# Altium PCB 射频功放HMC580.PcbDoc
Units mil, origin at the board's own origin, x right, y up, seen from the top; angles counter-clockwise.
Board outline 1035 x 1005 mil, 2 copper layers (Top Layer, Bottom Layer); 12 components, 8 nets, 32 pads, 0 vias.
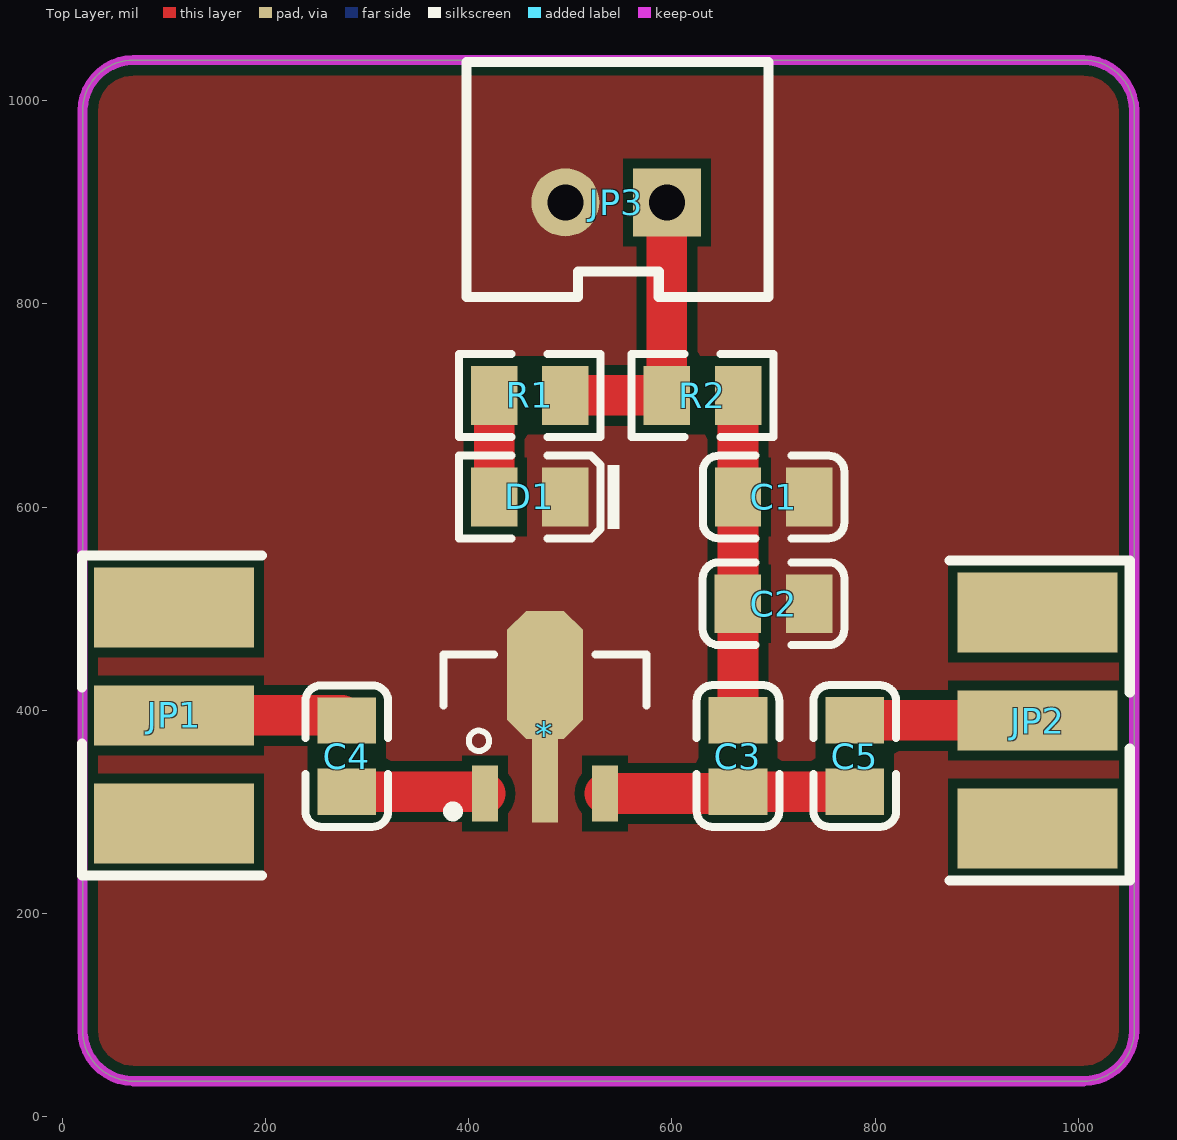
[diagram p0: Top Layer view]
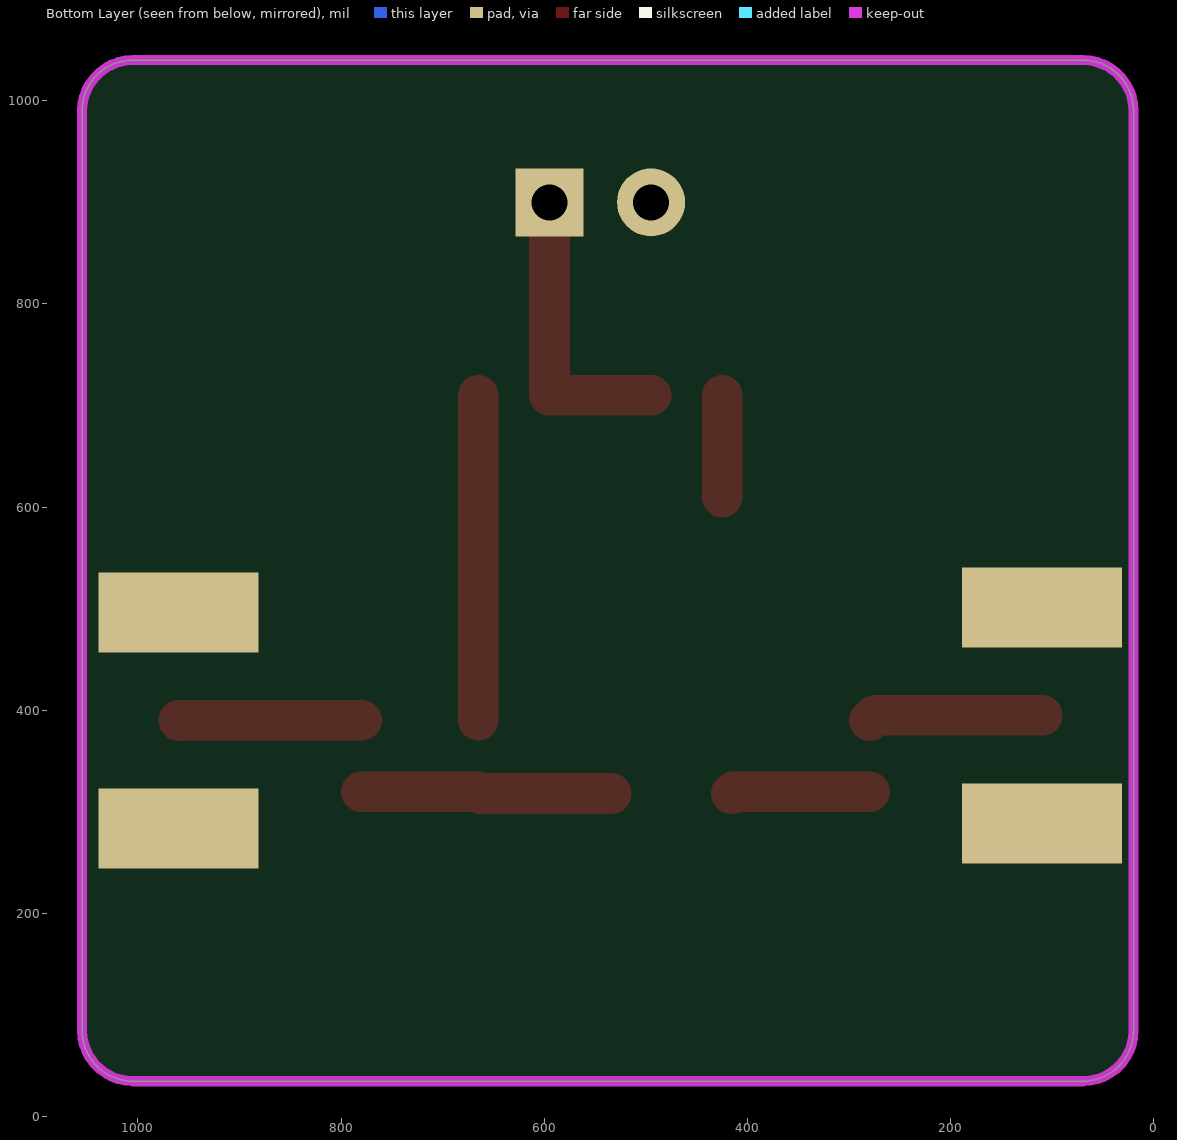
[diagram p1: Bottom Layer view, seen from below]

## Layer stack, top to bottom
Top Solder: solder mask 0.4, Solder Resist, Dk 3.5
Top Layer: signal copper 1.4
Dielectric 1: dielectric 12.6, FR-4, Dk 4.8
Bottom Layer: signal copper 1.4
Bottom Solder: solder mask 0.4, Solder Resist, Dk 3.5

## Board outline
20,85 20,990 cw(c70,990) 70,1040 1005,1040 cw(c1005,990) 1055,990 1055,85 cw(c1005,85) 1005,35 70,35 cw(c70,85)

## Design rules (kind name [scope] priority, off if disabled: settings)
Clearance [All] p1: gap=10 ignorepadtopadclearanceinfootprint=FALSE except(0: Arc-Hole Track-Hole SMDPad-Hole THPad-Hole Via-Hole Fill-Hole Poly-Hole Region-Hole Text-Hole)
PolygonConnect [All] p1: connectstyle=Direct reliefconductorwidth=10 reliefentries=4 polygonreliefangle="90 Angle" airgapwidth=10
RoutingVias [All] p1: holewidth=28 width=50 viastyle="Through Hole" minholewidth=28 minwidth=50 maxholewidth=28 maxwidth=50
SolderMaskExpansion [All] p1: expansion=4
Width [All] p1: maxlimit=50 minlimit=10 preferedwidth=10 bottomlayer_maxwidth=10 minimp=50.000000 maximp=50.000000 favimp=50.000000
30 further rules are at their usual default settings.

## Components (designator, comment, footprint, x,y, rotation, side; value= is the part's Value field where it differs from the comment)
* "Component_1" SOT89_N 475,395 r0 top
C1 "1.5nF (152) 10% 50V" 0805_C 700.04,610 r180 top
C2 "1.5nF (152) 10% 50V" 0805_C 700,505 r180 top
C3 "1.5nF (152) 10% 50V" 0805_C 665,355.04 r90 top
C4 "1.5nF (152) 10% 50V" 0805_C 280,354.96 r90 top
C5 "1.5nF (152) 10% 50V" 0805_C 780,355.04 r270 top
D1 "翠绿 0805" 0805_LED_S1 459.96,610 r180 top
JP1 "SMA WIFI 天线接口" SMA-KE 110,395 r90 top
JP2 "SMA WIFI 天线接口" SMA-KE 960,390 r270 top
JP3 "HDR-1X2" XH2.54-LI-2P 545,900 r180 top
R1 "1.5MΩ (1504) ±1%" 0805_R 460.04,710 r180 top
R2 "1.5MΩ (1504) ±1%" 0805_R 630.04,710 r180 top

## Footprints (in the part's own frame and the unit in brackets; to place one, negate y for a bottom-side part, rotate by r counter-clockwise, add the part's x,y. Pads: shape width x height; smd on the part's side, far side on the other; paste and mask are expansions set on the pad)
0805_C [mm]
  rect 1.16x1.47 smd: 1(-0.89,0) 2(0.89,0)
  silkscreen extent -1.77,-1.04 1.77,1.04, body extent -1,-0.62 1,0.63, height 0.77
0805_LED_S1 [mm]
  rect 1.16x1.47 smd: A(0.89,0) K(-0.89,0)
  silkscreen extent -2.25,-1.04 1.77,1.03, body extent -1.01,-0.62 1.01,0.62, height 1.1
0805_R [mm]
  rect 1.16x1.47 smd: 1(-0.89,0) 2(0.89,0)
  silkscreen extent -1.77,-1.04 1.77,1.03, body extent -1,-0.62 1,0.63, height 0.49
SMA-KE [mm] "SMA 偏脚射频天线座     淘宝ID:黄晶宝石"
  rect 1.5x4 smd: 1(0,0)
  rect 2x4 smd: 2(-2.7,0) 2(2.7,0)
  rect 2x4 smd far side: 3(-2.7,0) 3(2.7,0)
  silkscreen extent -4,-2.2 4,2.3, body extent -3.25,-1.3 3.25,12.2, height 3.75
SOT89_N [mm] "4.6x4.3x1.6mm(长宽高)"
  rect 0.65x1.4 smd: 1(-1.5,-1.952) 3(1.5,-1.952)
  rect 0.65x2.1 smd: 2(0,-1.626)
  oct 1.9x3.2 smd: 2(0,1.016)
  silkscreen extent -2.54,-2.52 2.54,1.52, body extent -2.3,-2.4 2.3,1.9, height 1.6
XH2.54-LI-2P [mm] "接插件，2P"
  rect 1.7x1.7 hole 0.9: 1(-1.27,0)
  round 1.7 hole 0.9: 2(1.27,0)
  silkscreen extent -3.81,-3.51 3.74,2.37, body extent -3.77,-3.3 3.77,2.4, height 7.05

## Part data
C1 C2 C3 C4 C5: library part "0805 1.5nF (152) 10% 50V", "贴片电容", Package=0805, SuppliersPartNumber=C1717, ComponentLink1Description=供应商链接, ComponentLink1URL=http://www.szlcsc.com/product/details_2069.html, Supplier=LC
D1: library part "0805 翠绿", "发光二极管", Package=0805, SuppliersPartNumber=C2297, ComponentLink1Description=供应商链接, ComponentLink1URL=http://www.szlcsc.com/product/details_2670.html, Supplier=LC
JP1 JP2: library part SMA, "SMA-2.4G射频天线接口"
JP3: library part "Header 2", "2P接插件", BOM名称=2P接插件
R1 R2: library part "0805 1.5MΩ (1504) 1%", "贴片电阻", Package=0805, SuppliersPartNumber=C26110, ComponentLink1Description=供应商链接, ComponentLink1URL=http://www.szlcsc.com/product/details_26853.html, Supplier=LC

## Nets (pads, with @x,y where several pads share a name; then routed paths per layer and width w, separated by ;. In a path a pad name is that pad's centre, name@x,y a point inside that pad or via, vN(x,y) a via of type N, cw(c..) or ccw(c..) an arc to the next point about the centre after c; other vN are vias at no path point)
+5: JP3.1 R1.1 R2.2 | length 289.9
  Top Layer w40: R1.1 R2.2 JP3.1
gnd: *.2 C1.1 C2.1 D1.K JP3.2
input: C4.2 JP1.1 | length 172.1
  Top Layer w40: JP1.1 275,395 C4.2
Net*_1: *.1 C4.1 | length 136.7
  Top Layer w40: C4.1 414.16,319.92 *.1
Net*_3: *.3 C3.1 C5.2 | length 246.7
  Top Layer w40: *.3 663.13,318.13 C3.1 C5.2
NetC1_2: C1.2 C2.2 C3.2 R2.1 | length 320
  Top Layer w40: C3.2 C3.2 C2.2 C2.2 C1.2 665.08,610.08 R2.1
NetD1_A: D1.A R1.2 | length 100
  Top Layer w40: D1.A 425,610.08 R1.2
output: C5.1 JP2.1 | length 180
  Top Layer w40: C5.1 959.92,390.08 JP2.1
pads on no net: JP1.2 JP1.3 JP2.2 JP2.3

## Polygon pours and split planes (outlines as drawn)
gnd on Top Layer "Top Layer-No Net" (solid, pour order 0): 20,85 20,990 cw(c70,990) 70,1040 1005,1040 cw(c1005,990) 1055,990 1055,85 cw(c1005,85) 1005,35 70,35 cw(c70,85)

## Keep-outs
Keep-Out Layer:
  lines w10: 20,85 ccw(c70,85) 70,35 435,35 1005,35 ccw(c1005,85) 1055,85 1055,140 1055,990 ccw(c1005,990) 1005,1040 70,1040 ccw(c70,990) 20,990 20,870 20,85

## Silkscreen, mask and mechanical layers (free items; w line width, h text height)
Mechanical 1:
  lines w10: 20,85 ccw(c70,85) 70,35 255,35 1005,35 ccw(c1005,85) 1055,85 1055,135 1055,990 ccw(c1005,990) 1005,1040 295,1040 70,1040 ccw(c70,990) 20,990 20,175 20,125 20,85